# Altium PCB Quadcopter_final.PcbDoc
Units mm, origin at the board's own origin, x right, y up, seen from the top; angles counter-clockwise.
Board outline 100 x 100 mm, 2 copper layers (Top Layer, Bottom Layer); 90 components, 79 nets, 319 pads, 71 vias.
Unrouted connection lines stored in the file: 6.
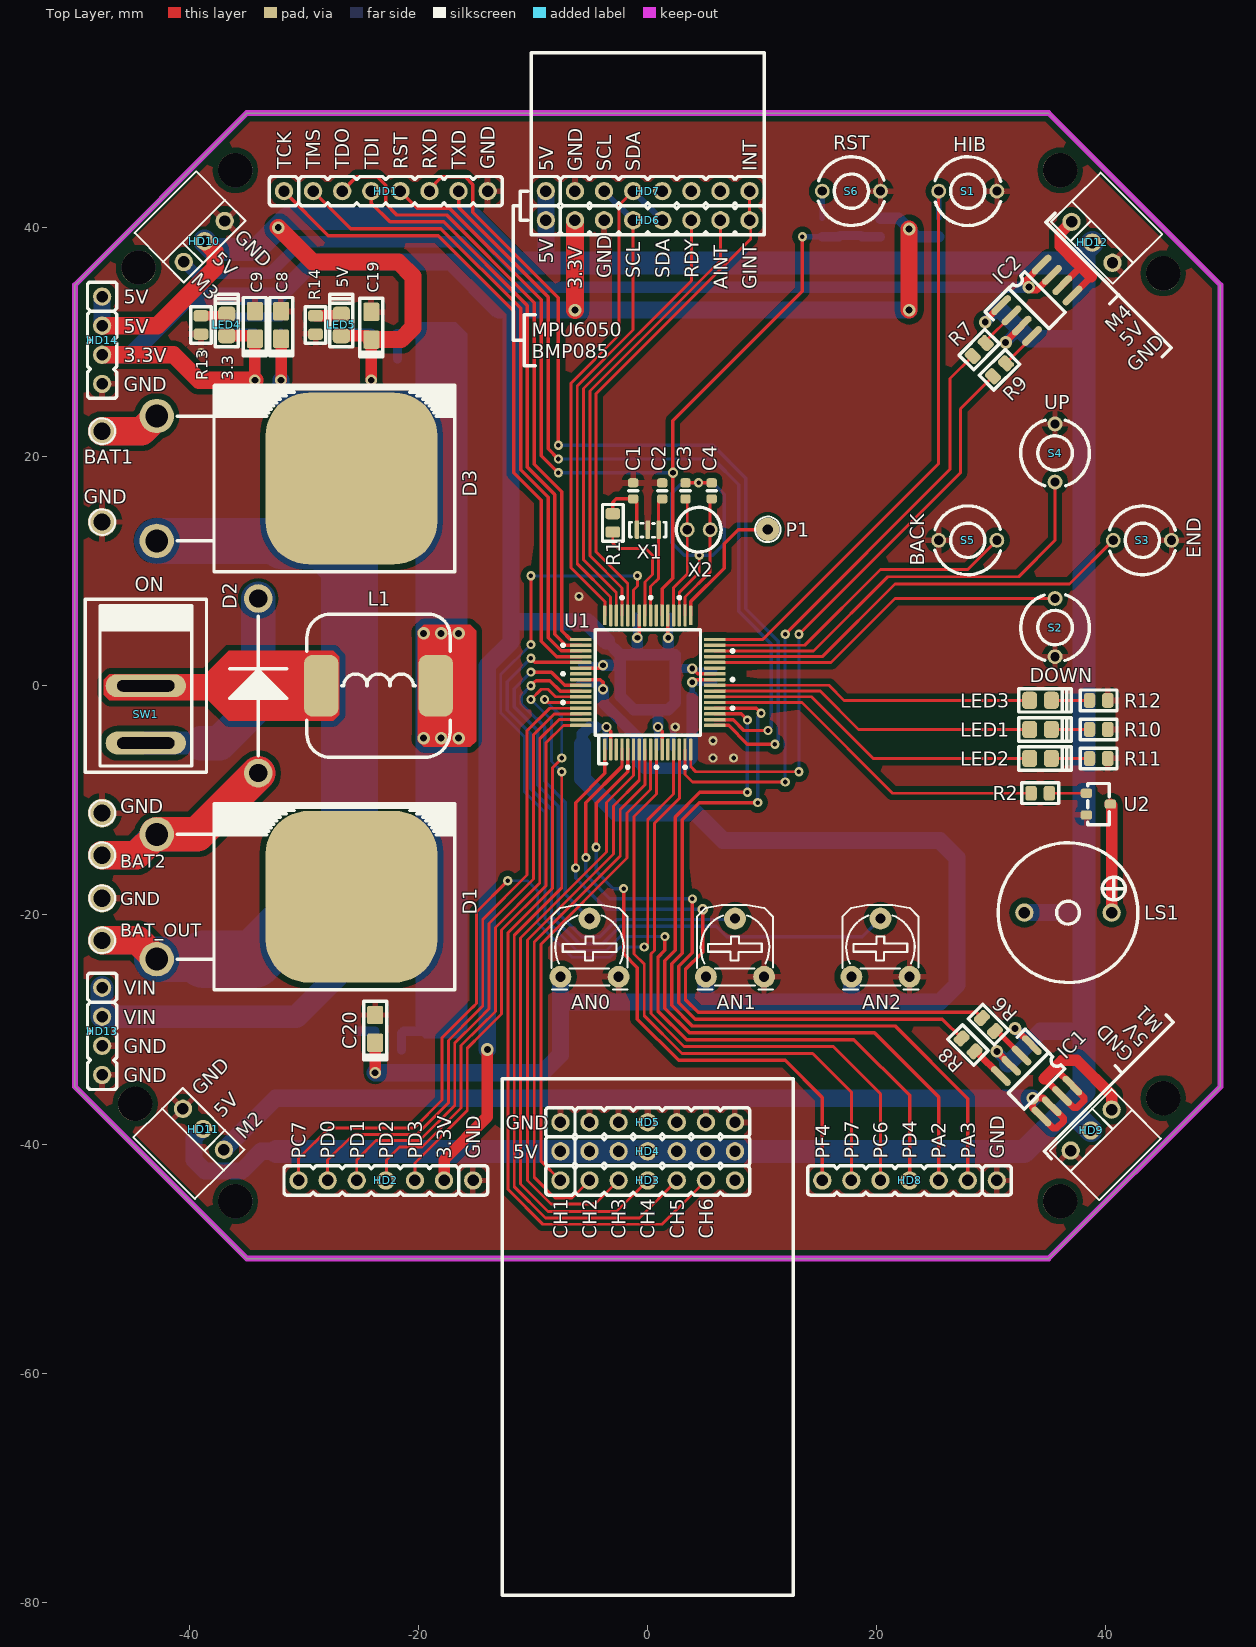
[diagram p0: Top Layer view]
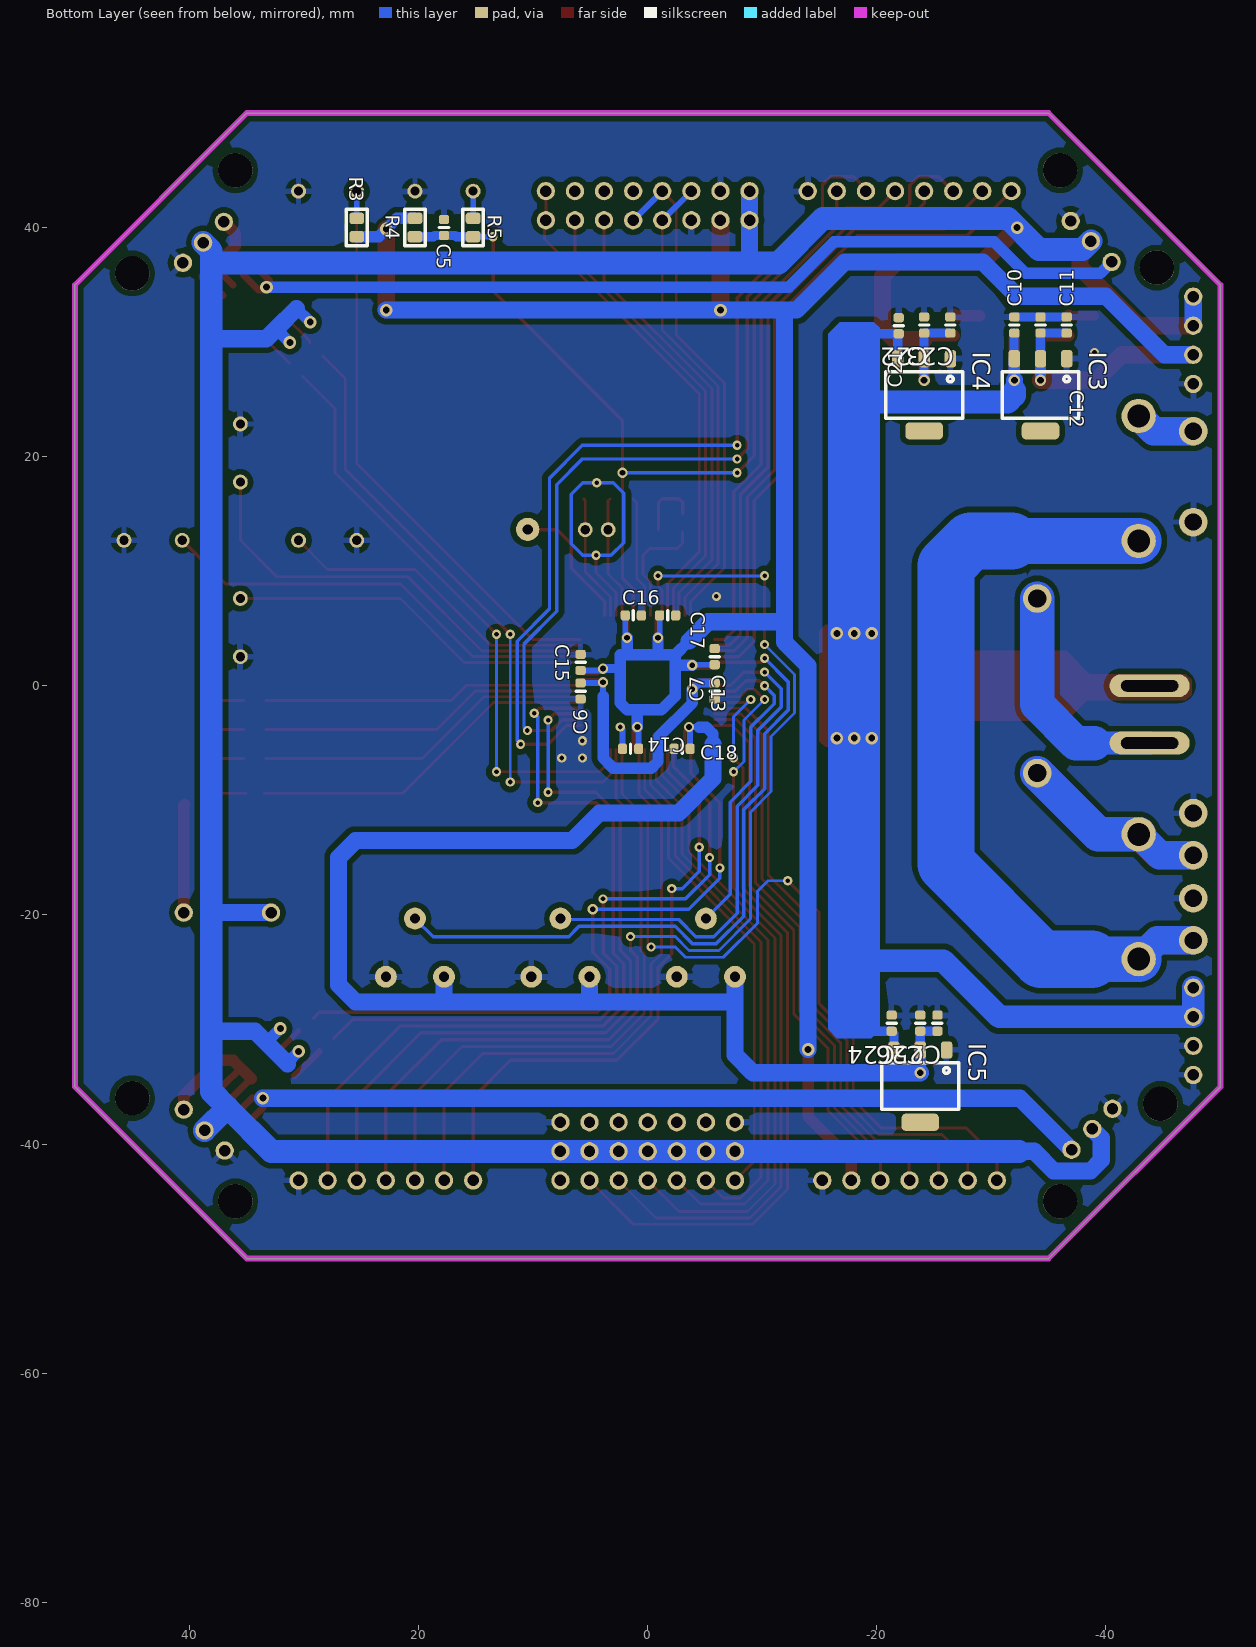
[diagram p1: Bottom Layer view, seen from below]
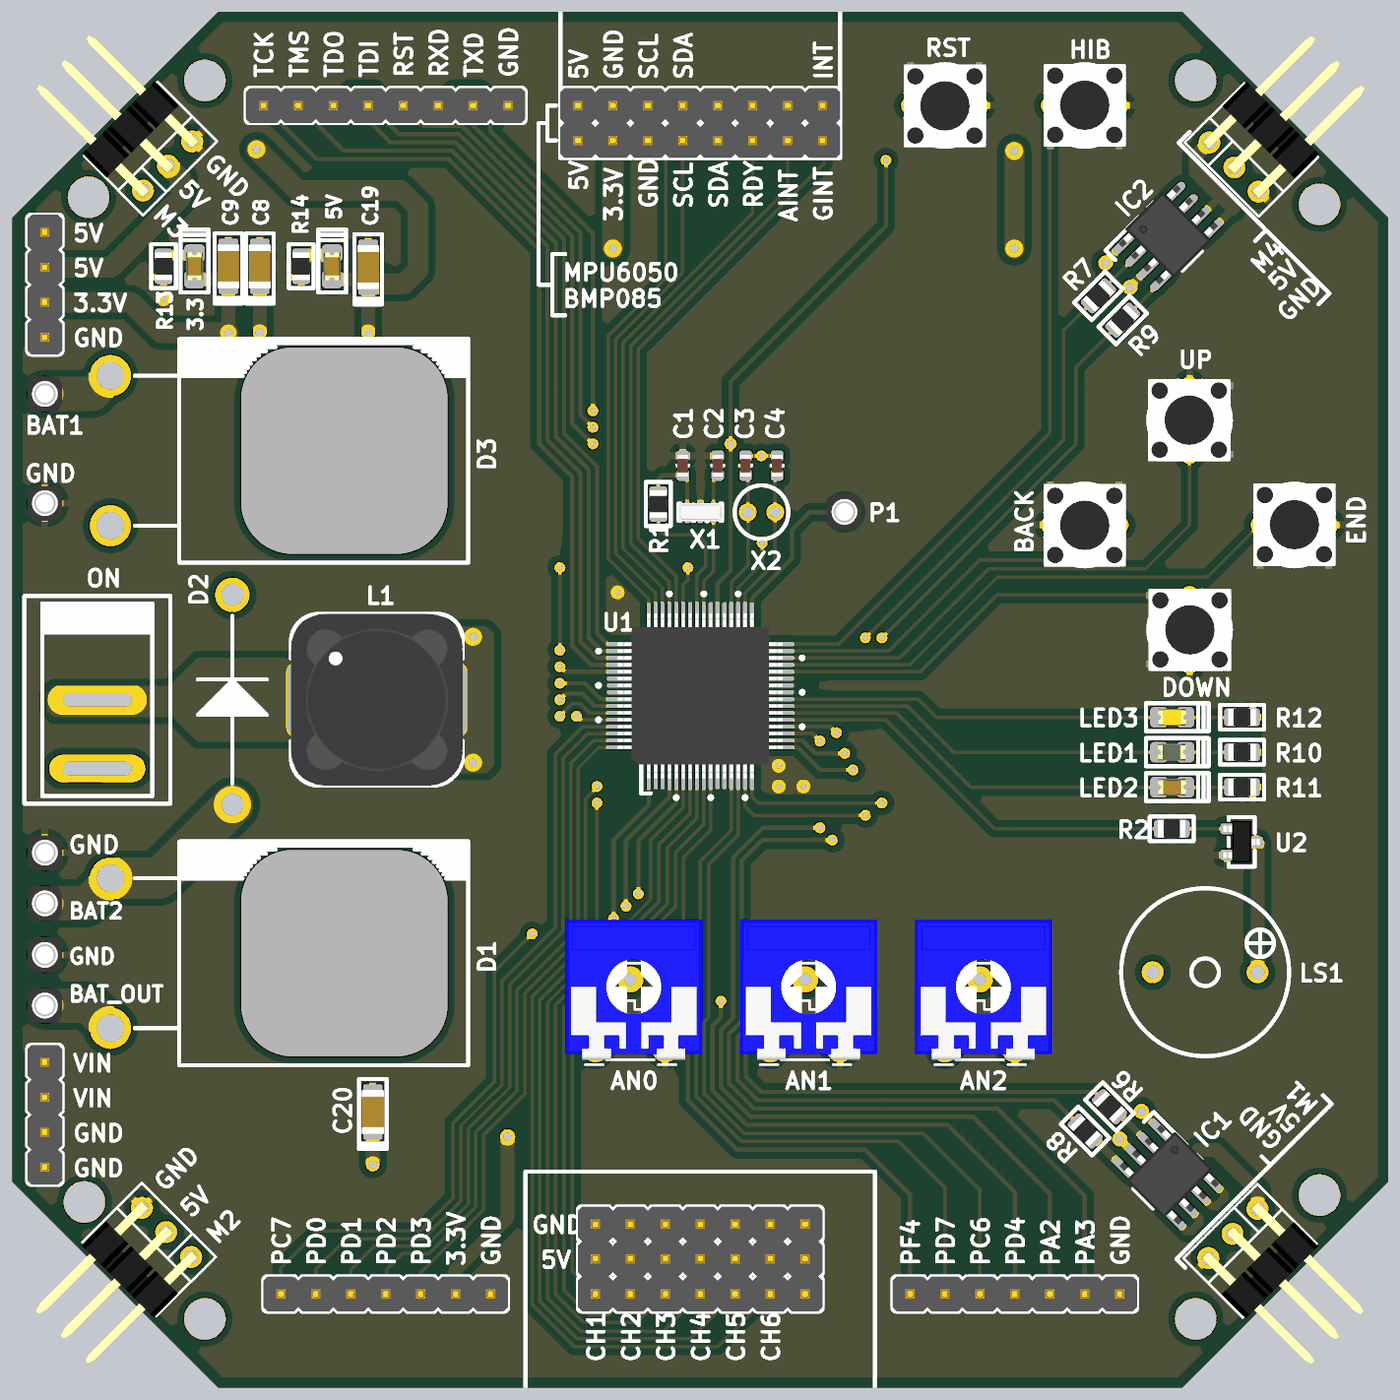
[diagram p2: 3D render of the assembled board from above, using the file's embedded part models]
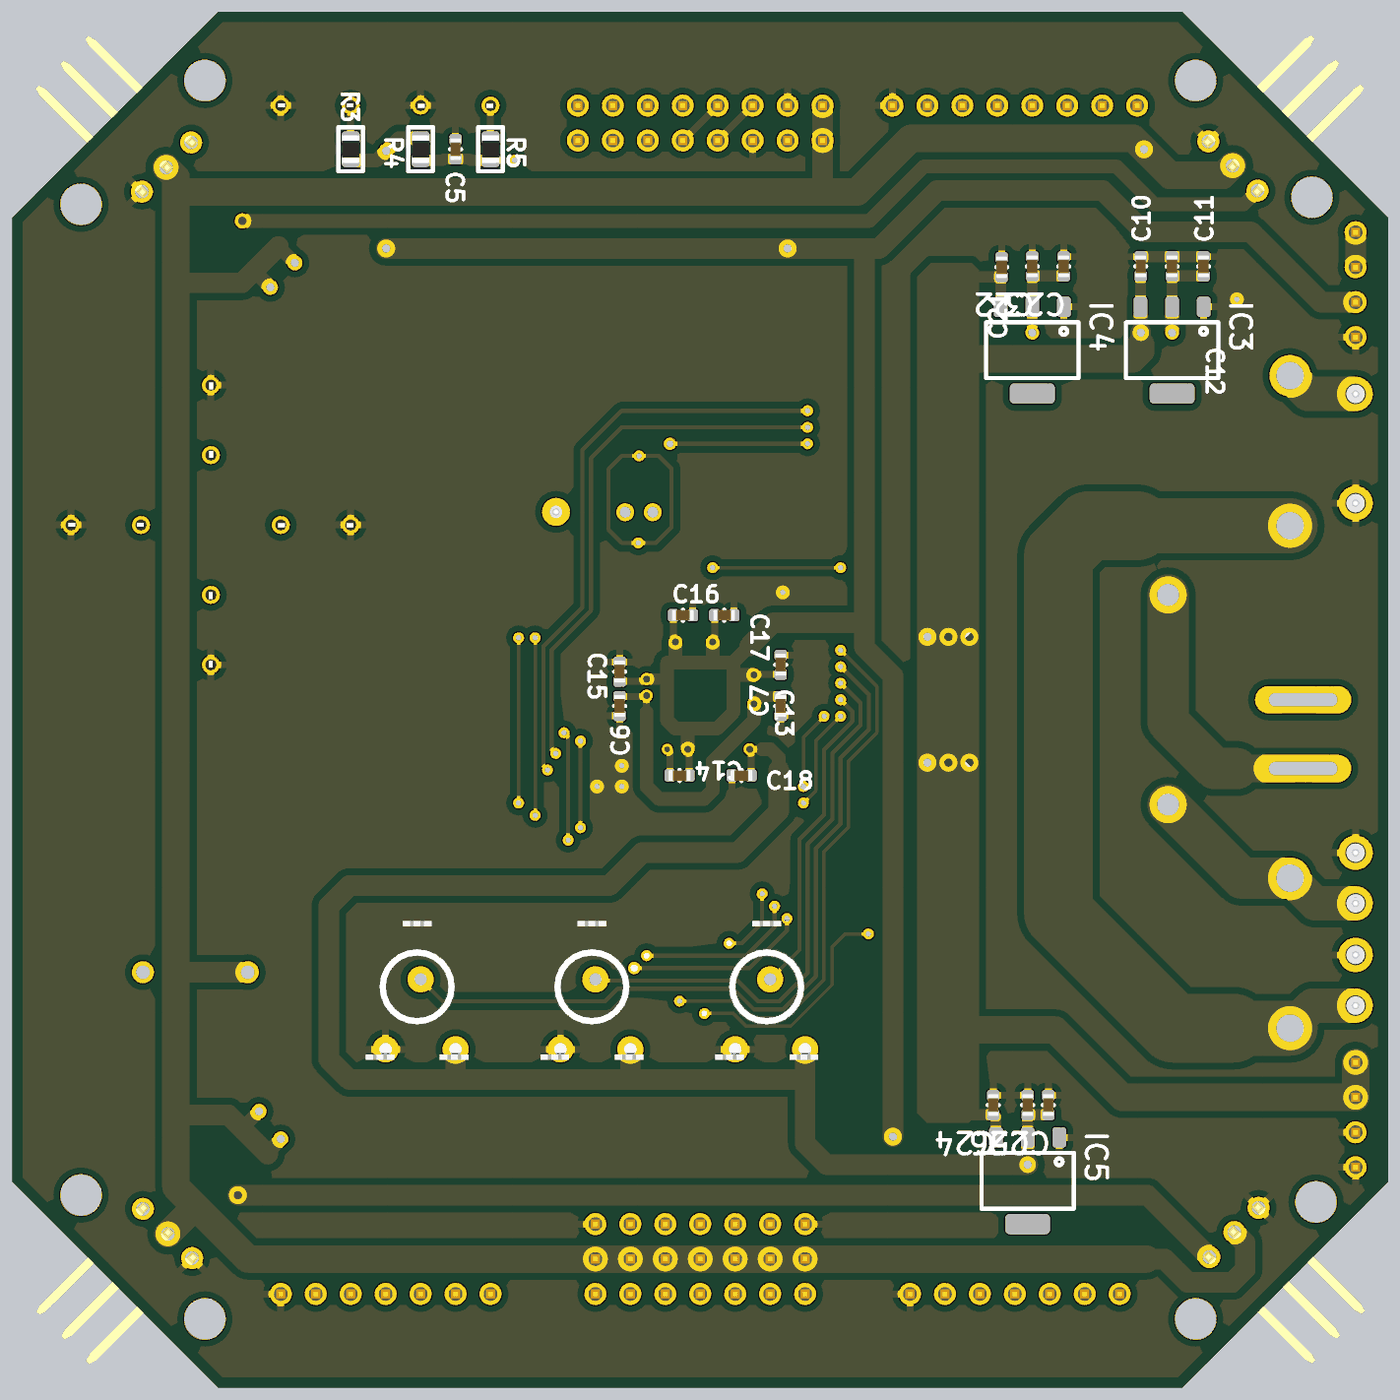
[diagram p3: 3D render of the assembled board from below, using the file's embedded part models]

## Layer stack, top to bottom
Top Layer: signal copper 0.0356
Dielectric: dielectric 0.32, FR-4, Dk 4.8
Bottom Layer: signal copper 0.0356

## Board outline
-50,-35 -35,-50 35,-50 50,-35 50,35 35,50 -35,50 -50,35

## Design rules (kind name [scope] priority, off if disabled: settings)
Clearance [All] p1: gap=0.5
PlaneClearance [All] p1: clearance=0.5
PolygonConnect PolygonConnect_1 [isvia] p1: connectstyle=Direct reliefconductorwidth=0.254 reliefentries=4 polygonreliefangle="90 Angle"
PolygonConnect [All] p2: connectstyle=Relief reliefconductorwidth=0.5 reliefentries=4 polygonreliefangle="90 Angle"
RoutingVias [All] p1: holewidth=0.4 width=0.8 viastyle="Through Hole" minholewidth=0.4 minwidth=0.8 maxholewidth=0.6 maxwidth=1.1
SilkscreenOverComponentPads [All] p1: minsilkscreentomaskgap=0.254
SolderMaskExpansion [All] p1: expansion=0.102
Width [All] p1: maxlimit=5 minlimit=0.25 preferedwidth=0.5
26 further rules are at their usual default settings.

## Components (designator, comment, footprint, x,y, rotation, side; value= is the part's Value field where it differs from the comment)
AN0 "10K" VR -7.62,-25.4 r0 top (schematic designator VR2)
AN1 "10K" VR 5.08,-25.4 r0 top (schematic designator VR1)
AN2 "10K" VR 17.78,-25.4 r0 top (schematic designator VR3)
BAT1 "Pad" TP1#1 -47.625,22.225 r0 top (schematic designator P7)
BAT2 "Pad" TP1#1 -47.625,-14.795 r0 top (schematic designator P4)
BAT_OUT "Pad" TP1#1 -47.625,-22.225 r0 top (schematic designator P2)
C1 "10pF" C0603 -1.27,17.018 r270 top
C2 "10pF" C0603 1.27,17.018 r270 top
C3 "22pF" C0603 3.302,17.018 r90 top
C4 "22pF" C0603 5.588,17.018 r270 top
C5 "SMD Cap" C0603 17.78,40.005 r90 bottom
C6 "SMD Cap" C0603 5.857,-0.458 r270 bottom
C7 "SMD Cap" C0603 -5.843,-0.458 r270 bottom
C8 "Cap Tan" CAP_TANTA_1uF_16V -32.004,31.496 r90 top
C9 "Cap Tan" CAP_TANTA_1uF_16V -34.29,31.496 r90 top
C10 "SMD Cap" C0603 -32.004,31.496 r270 bottom
C11 "SMD Cap" C0603 -36.576,31.496 r270 bottom
C12 "SMD Cap" C0603 -34.29,31.496 r270 bottom
C13 "SMD Cap" C0603 -5.843,2.542 r90 bottom
C14 "SMD Cap" C0603 1.5,-5.5 r0 bottom
C15 "SMD Cap" C0603 5.857,2.042 r90 bottom
C16 "SMD Cap" C0603 1.257,6.142 r180 bottom
C17 "SMD Cap" C0603 -1.743,6.142 r180 bottom
C18 "SMD Cap" C0603 -3,-5.5 r0 bottom
C19 "Cap Tan" CAP_TANTA_1uF_16V -24.13,31.432 r90 top
C20 "Cap Tan" CAP_TANTA_1uF_16V -23.793,-29.953 r90 top
C21 "SMD Cap" C0603 -21.907,31.432 r270 bottom
C22 "SMD Cap" C0603 -24.13,31.496 r270 bottom
C23 "SMD Cap" C0603 -26.416,31.496 r270 bottom
C24 "SMD Cap" C0603 -21.292,-29.452 r270 bottom
C25 "SMD Cap" C0603 -25.293,-29.452 r270 bottom
C26 "SMD Cap" C0603 -23.793,-29.452 r270 bottom
D1 "DSEI60-06A" DSEI60-06A_STAND -42.863,-18.415 r270 top
D2 "1N5822" 1N5822 -34,0 r90 top
D3 "DSEI60-06A" DSEI60-06A_STAND -42.863,18.097 r270 top
GND "Pad" TP1#1 -47.625,-18.542 r90 top (schematic designator P3)
GND "Pad" TP1#1 -47.625,-11.112 r90 top (schematic designator P5)
GND "Pad" TP1#1 -47.625,14.287 r90 top (schematic designator P6)
HD1 "SWD" Header_8 -22.86,43.18 r0 top
HD2 "Header 7" Header_7 -22.86,-43.18 r180 top
HD3 "Header 7" Header_7 0,-43.18 r0 top
HD4 "Header 7" Header_7 0,-40.64 r0 top
HD5 "Header 7" Header_7 0,-38.1 r0 top
HD6 "GY-85 BMP085" Header_8 0,40.64 r0 top
HD7 "MPU6050" Header_8 0,43.18 r0 top
HD8 "Header 7" Header_7 22.86,-43.18 r180 top
HD9 "Header 3" JP3H_NAM 40.5,-37 r225 top
HD10 "Header 3" JP3H_NAM -40.5,37 r45 top
HD11 "Header 3" JP3H_NAM -37,-40.5 r135 top
HD12 "Header 3" JP3H_NAM 37,40.5 r315 top
HD13 "Power" Header_4 -47.625,-30.162 r270 top
HD14 "Power" Header_4 -47.625,30.162 r270 top
IC1 "APM4953" SOIC-8D 33.947,-34.489 r315 top
IC2 "APM4953" SOIC-8D 33.972,33.655 r45 top
IC3 "AMS1117-3.3V" AMS1117-3.3V -34.29,25.4 r270 bottom
IC4 "AMS1117-5V" AMS1117-3.3V -24.13,25.4 r270 bottom
IC5 "AMS1117-3.3V" AMS1117-3.3V -23.793,-34.952 r270 bottom
L1 "150mH/3A" "Inductor 150mH,3A" -23.5,0 r0 top
LED1 "Green" "Led 0805G" 34.29,-3.81 r0 top
LED2 "Red" "Led 0805R" 34.29,-6.35 r0 top
LED3 "Yellow" "Led 0805Y" 34.29,-1.27 r0 top
LED4 "Red" "Led 0805R" -36.75,31.5 r90 top
LED5 "Red" "Led 0805R" -26.75,31.5 r90 top
LS1 "Speaker" SPEAKER 40.5,-19.8 r180 top
P1 "Pad" TP1#2 10.477,13.652 r90 top
R1 "Res2" RESC2012L -3.048,14.224 r90 top
R2 "Res2" RESC2012L 34.265,-9.377 r0 top
R3 "Res2" RESC2012L 25.4,40.005 r90 bottom
R4 "Res2" RESC2012L 20.32,40.005 r90 bottom
R5 "Res2" RESC2012L 15.24,40.005 r270 bottom
R6 "Res2" RESC2012L 29.741,-29.575 r315 top
R7 "Res2" RESC2012L 28.94,29.354 r45 top
R8 "Res2" RESC2012L 27.973,-31.343 r315 top
R9 "Res2" RESC2012L 30.708,27.586 r45 top
R10 "330R" RESC2012L 39.37,-3.81 r0 top
R11 "330R" RESC2012L 39.37,-6.35 r0 top
R12 "330R" RESC2012L 39.37,-1.27 r0 top
R13 "560R" RESC2012L -39,31.5 r270 top
R14 "1K" RESC2012L -29,31.5 r270 top
S1 "WAKE" "BUTTON 2PIN TRON" 27.94,43.18 r180 top
S2 "DOWN" "BUTTON 2PIN TRON" 35.56,5.08 r90 top
S3 "UP" "BUTTON 2PIN TRON" 43.18,12.7 r180 top
S4 "ENT" "BUTTON 2PIN TRON" 35.56,20.32 r270 top
S5 "BACK" "BUTTON 2PIN TRON" 27.94,12.7 r0 top
S6 "RESET" "BUTTON 2PIN TRON" 17.78,43.18 r0 top
SW1 "ON/OFF" CKCD11-101 -43.815,0 r90 top
U1 "TM4C123GH6PM" TM4C123GH6PM 0.007,0.292 r0 top
U2 "2N2222" MMBT2222A 39.345,-10.33 r270 top
X1 "16Mhz" CSTCE16M0V53-R0 0.007,13.627 r180 top
X2 "32768Hz" "32.678 Khz" 4.452,13.627 r0 top

## Footprints (in the part's own frame and the unit in brackets; to place one, negate y for a bottom-side part, rotate by r counter-clockwise, add the part's x,y. Pads: shape width x height; smd on the part's side, far side on the other; paste and mask are expansions set on the pad)
1N5822 [mm] "DIODE_DIP"
  round 2.5 hole 1.6 mask+0.1: 1(-7.62,0) 2(7.62,0)
  silkscreen extent -6.09,-2.62 6.09,2.63
"32.678 Khz" [mm] "32.678 Khz"
  round 1.3 hole 0.8 mask+0.1: 1(-1,0) 2(1,0)
  silkscreen extent -1.95,-1.95 1.95,1.95
AMS1117-3.3V [mm] "SOT223, 4-Leads, Body 6.7x7.3mm (max), Pitch 2.30mm, IPC Medium Density"
  rrect50% 1.5x1 smd: 1(-3.15,2.3) 2(-3.15,0) 3(-3.15,-2.3)
  rrect50% 1.5x3.28 smd: 4(3.15,0)
  silkscreen extent -2.03,-3.35 2.03,3.36
"BUTTON 2PIN TRON" [mm] "PIN TO PIN 5.08, W=6MM"
  round 1.3 hole 0.8: 1(-2.54,0) 2(2.54,0)
  silkscreen extent -2.87,-3 2.86,3, body extent -3,-3.02 3,3.18, height 4.3
C0603 [mm] "Chip Capacitor, Body 1.6x0.8mm, 1608"
  rrect50% 0.8x0.9 smd: 1(-0.7,0) 2(0.7,0)
  silkscreen extent 0,-0.4 0,0.4, body extent -0.8,-0.4 0.8,0.4, height 0.6
CAP_TANTA_1uF_16V [mm] "CAP TANTALUM 1uF 16V 10% C1206(3216), Body 3.2x1.6mm"
  rrect20% 1.6x1.4 smd: 1(-1.21,0) 2(1.21,0)
  silkscreen extent -2.7,-1 2.4,1, body extent -1.6,-0.8 1.6,0.8, height 1
CKCD11-101 [mm] "Cong tac on off 15.1x10.6mm"
  oval 2x7 hole 1 slot 5 at 90 deg mask+0.1: 1(-5,0) 2(0,0)
  silkscreen extent -7.55,-5.3 7.55,5.3
CSTCE16M0V53-R0 [mm] "Cryxtal 16MHz_SMD"
  rrect50% 0.4x1.6 smd: 1(0.95,0) 2(-0.95,0) 3(0,0)
  silkscreen extent -1.6,-0.65 1.6,0.66, body extent -1.6,-0.65 1.6,0.65, height 1.02
DSEI60-06A_STAND [mm] "Dioed 6A_Stand"
  round 3 hole 2: 1(-5.45,0) 2(5.45,0)
  rrect50% 15x15 smd mask+0.1: 3(0,17)
  silkscreen extent -8.13,1.78 8.14,26
Header_4 [mm] "Connector DIP, 4Pin_2.54mm"
  round 1.6 hole 1 mask+0.1: 1(-3.81,0) 2(-1.27,0) 3(1.27,0) 4(3.81,0)
  silkscreen extent -5.08,-1.28 5.08,1.28, body extent -5.08,-1.27 5.08,1.27, height 10.1
Header_7 [mm] "Connector DIP Male, 7Pin_2.54mm"
  round 1.6 hole 1 mask+0.1: 1(-7.62,0) 2(-5.08,0) 3(-2.54,0) 4(0,0) 5(2.54,0) 6(5.08,0) 7(7.62,0)
  silkscreen extent -8.89,-1.28 8.89,1.28, body extent -8.89,-1.27 8.89,1.27, height 10.1
Header_8 [mm] "Connector DIP Male, 8Pin_2.54mm"
  round 1.6 hole 1 mask+0.1: 1(-8.89,0) 2(-6.35,0) 3(-3.81,0) 4(-1.27,0) 5(1.27,0) 6(3.81,0) 7(6.35,0) 8(8.89,0)
  silkscreen extent -10.16,-1.28 10.16,1.28, body extent -10.16,-1.27 10.16,1.27, height 10.1
"Inductor 150mH,3A" [mm] "Inductor 150mH,3A"
  rrect50% 3x5.4 smd mask+0.1: 1(-5,0) 2(5,0)
  silkscreen extent -6.25,-6.25 6.25,6.25, body extent -6.25,-6.25 6.25,6.25, height 6.7
JP3H_NAM [mm]
  round 1.6 hole 1: 1(0,0) 2(2.565,0) 3(5.055,0)
  silkscreen extent -1.27,-1.27 6.35,4.83, body extent -1.2,-0.38 6.22,10.76, height 2.52
"Led 0805G" [mm] "Chip LED; Green; Body 2.0 x 1.3 mm (LxW typ)"
  rrect50% 1.3x1.5 smd: 1(-0.95,0) 2(0.95,0)
  silkscreen extent -1.91,-1.02 2.67,1.02, body extent -1.04,-0.62 0.98,0.62, height 1.1
"Led 0805R" [mm] "Chip LED; RED ; Body 2.0 x 1.3 mm (LxW typ)"
  rrect50% 1.3x1.5 smd: 1(-0.95,0) 2(0.95,0)
  silkscreen extent -1.91,-1.02 2.67,1.02, body extent -1.01,-0.63 1.01,0.62, height 1.1
"Led 0805Y" [mm] "Chip LED; Yellow; Body 2.0 x 1.3 mm (LxW typ)"
  rrect50% 1.3x1.5 smd: 1(-0.95,0) 2(0.95,0)
  silkscreen extent -1.91,-1.02 2.67,1.02, body extent -1.01,-0.63 1.01,0.62, height 1.1
MMBT2222A [mm] "SOT23-3"
  rrect50% 0.8x1 smd: 1(-0.95,-1.05) 2(0.95,-1.05) 3(0,1.05)
  silkscreen extent -1.8,-0.95 1.8,0.95, body extent -1.5,-1.32 1.5,1.32, height 1.08
RESC2012L [mm] "Chip Resistor, Body 2.0x1.3mm, 1/8W 0805"
  rrect50% 1x1.3 smd: 1(-0.8,0) 2(0.8,0)
  silkscreen extent -1.6,-0.9 1.6,0.9, body extent -1,-0.62 1,0.63, height 0.6
SOIC-8D [mm] "SOIC 8PIN, 1.27mm"
  oval 2.2x0.6 smd: 1(-2.5,1.905) 2(-2.5,0.635) 3(-2.5,-0.635) 4(-2.5,-1.905) 5(2.5,-1.905) 6(2.5,-0.635) 7(2.5,0.635) 8(2.5,1.905)
  silkscreen extent -3.9,-2.5 1,2.5, body extent -2.89,-2.43 3.15,2.59, height 1.6
SPEAKER [mm] "TMB12A05"
  round 1.6 hole 1 mask+0.1: 1(0,0) 2(7.62,0)
  silkscreen extent -2.29,-6.1 9.91,6.1
TM4C123GH6PM [mm]
  rrect50% 0.3x1.9 smd mask+0.05: 1(-3.75,-5.85) 2(-3.25,-5.85) 3(-2.75,-5.85) 4(-2.25,-5.85) 5(-1.75,-5.85) 6(-1.25,-5.85) 7(-0.75,-5.85) 8(-0.25,-5.85) 9(0.25,-5.85) 10(0.75,-5.85) 11(1.25,-5.85) 12(1.75,-5.85) 13(2.25,-5.85) 14(2.75,-5.85) 15(3.25,-5.85) 16(3.75,-5.85) 34(3.25,5.85) 35(2.75,5.85) 36(2.25,5.85) 37(1.75,5.85) 38(1.25,5.85) 39(0.75,5.85) 40(0.25,5.85) 41(-0.25,5.85) 42(-0.75,5.85) 43(-1.25,5.85) 44(-1.75,5.85) 45(-2.25,5.85) 46(-2.75,5.85) 47(-3.25,5.85)
  rrect50% 1.9x0.3 smd mask+0.05: 17(5.85,-3.75) 18(5.85,-3.25) 19(5.85,-2.75) 20(5.85,-2.25) 21(5.85,-1.75) 22(5.85,-1.25) 23(5.85,-0.75) 24(5.85,-0.25) 25(5.85,0.25) 26(5.85,0.75) 27(5.85,1.25) 28(5.85,1.75) 29(5.85,2.25) 30(5.85,2.75) 31(5.85,3.25) 32(5.85,3.75) 49(-5.85,3.75) 50(-5.85,3.25) 51(-5.85,2.75) 52(-5.85,2.25) 53(-5.85,1.75) 54(-5.85,1.25) 55(-5.85,0.75) 56(-5.85,0.25) 57(-5.85,-0.25) 58(-5.85,-0.75) 59(-5.85,-1.25) 60(-5.85,-1.75) 61(-5.85,-2.25) 62(-5.85,-2.75) 63(-5.85,-3.25) 64(-5.85,-3.75)
  rrect50% 0.3x1.7 smd mask+0.05: 33(3.75,5.85) 48(-3.75,5.85)
  silkscreen extent -7.5,-7.5 7.5,7.5, body extent -6,-6 6,6, height 1.56
TP1#1 [mm] "Test point"
  round 2.5 hole 1.5: 1(0,0)
  silkscreen extent -1.11,-1.12 1.12,1.12, body extent -1.27,-1.27 1.27,1.27, height 4.52
TP1#2 [mm] "Test point"
  round 2.032 hole 0.889: 1(0,0)
  silkscreen extent -1.12,-1.12 1.12,1.11, body extent -1.27,-1.27 1.27,1.27, height 4.52
VR [mil] "Resistor Variable"
  round 75 hole 35: 1(0,0) 2(100,200) 3(200,0)
  silkscreen extent -31,-44 231,246, body extent -87,-30 307,372, height 165

## Part data
AN0 AN1 AN2: library part VR1, "Var Resistor"
C1 C2 C3 C4 C6 C7 C13 C14 C15 C16 C17 C18: library part CN1, "0805-SMD Capacitor"
C5: library part Cap, "0805-10nF-50V Cap"
C8 C9 C19 C20: library part "Cap Pol2", "Cap Tantalum"
C10 C11 C12 C21 C22 C23 C24 C25 C26: library part "Cap Cera", "SMD Capacitor"
D1 D3: library part D1A, "Diode 60A"
D2: library part D1A, "Diode  3A"
HD1 HD6 HD7: library part Hed8, "Hedear 8"
HD2 HD3 HD4 HD5 HD8: library part Hed7
HD9 HD10 HD11 HD12: library part Hed3, "Header 3 (Green)"
HD13 HD14: library part Hed4, "Header 4 (Green)"
IC1 IC2: "Dual P-Channel Enhancement Mode MOSFET"
IC3 IC4 IC5: library part AMS1117
L1: library part L1, "Inductor"
LED1 LED2 LED3 LED4 LED5: library part LED, "LED Single colour Green and Red"
LS1: "Loudspeaker"
R1 R2 R3 R4 R5 R6 R7 R8 R9: "Resistor"
R10 R11 R12 R13 R14: library part R, "Resistor 1/4W"
S1 S2 S3 S4 S5 S6: library part SW-PB, "Switch"
SW1: library part SW2, "Switch button 2 pin"
U1: "Tiva C Series Microcontroller"
U2: "NPN switching transistors"
X1 X2: library part XT2, "Crystal For all Crystal 2pin."

## Free pads (board coordinates)
  round 3 hole 3: 0(36,-45) 1(45,-36) 2(36,45) 3(45,36) 4(-44.45,36.512) 5(-36,45) 6(-44.75,-36.5) 7(-36,-45)

## Via types
v1: diameter 0.8, hole 0.4, Top Layer to Bottom Layer, 40 vias
v2: diameter 1.1, hole 0.6, Top Layer to Bottom Layer, 17 vias
v3: diameter 0.9, hole 0.5, Top Layer to Bottom Layer, 10 vias
v4: diameter 1, hole 0.6, Top Layer to Bottom Layer, 4 vias

## Nets (pads, with @x,y where several pads share a name; then routed paths per layer and width w, separated by ;. In a path a pad name is that pad's centre, name@x,y a point inside that pad or via, vN(x,y) a via of type N, cw(c..) or ccw(c..) an arc to the next point about the centre after c; other vN are vias at no path point)
3V3: C9.1 C11.2 C12.2 C13.1 C14.1 C15.1 C16.1 C17.1 HD2.2 HD6.2 HD14.3 IC3.2 LED4.1 R3.1 R4.2 U1.11 U1.26 U1.37 U1.42 U1.54 | length 258
  Top Layer w0.3: U1.54 -4.157,1.542 v3(-3.9,1.8) ; v3(-0.9,4.2) -0.743,4.357 U1.42 ; v3(0.9,-3.6) 1.257,-3.957 U1.11 ; U1.37 1.757,4.243 v3(1.8,4.2) ; v3(3.9,1.5) 4.357,1.042 U1.26
  Top Layer w1: LED4.1 -34.554,30.55 C9.1 v4(-34.29,26.67) ; HD2.2 -17.78,-41.402 -14,-37.622 v2(-14,-31.75)
  Top Layer w1.5: HD14.3 -41.393,28.893 -39.17,26.67 v4(-34.29,26.67) ; v2(22.822,32.794) v2(22.822,39.878)
  Top Layer w1.55: v2(-6.35,32.794) HD6.2
  Bottom Layer w0.5: C13.1 -3.943,1.843 v3(-3.9,1.8) ; C17.1 -1.043,4.343 v3(-0.9,4.2) ; C14.1 0.8,-3.7 v3(0.9,-3.6) ; v3(1.8,4.2) 1.957,4.357 C16.1 ; v3(3.9,1.5) 4.058,1.342 C15.1
  Bottom Layer w0.8: C11.2 C12.2 IC3.2 ; 2.4,1.5 v3(3.9,1.5)
  Bottom Layer w1: v4(-34.29,26.67) IC3.2 ; v3(-3.9,1.8) -2.4,1.8 ; -3.6,3.9 -2.4,2.7 ; v3(-0.9,4.2) -0.9,2.7 ; v3(0.9,-3.6) 0.9,-2.1 ; v3(1.8,4.2) 1.8,2.7 ; R4.2 21.895,40.805 v2(22.822,39.878) 23.495,39.205 R3.1 ; -2.4,1.8 -2.4,2.7 ; -2.4,1.8 -2.4,-0.9 -1.2,-2.1 0.9,-2.1 ; -2.4,2.7 -0.9,2.7 ; -0.9,2.7 1.8,2.7 ; 0.9,-2.1 1.8,-2.1 2.4,-1.5 2.4,1.5 2.4,2.7 1.8,2.7
  Bottom Layer w1.5: HD14.3 -45.107,28.893 -40,34 -32.25,34 -29.25,37 -17.2,37 -12.994,32.794 -11.938,32.794 ; v2(-14,-31.75) -14,1.748 -11.938,3.81 -11.938,5.588 ; -3.6,3.9 -5.288,5.588 -11.938,5.588 ; v2(22.822,32.794) v2(-6.35,32.794) -11.938,32.794 ; -11.938,5.588 -11.938,32.794
3V3A: AN0.1 AN1.1 AN2.1 C18.1 C20.1 C25.2 C26.2 IC5.2 U1.2 | length 128
  Top Layer w0.3: v3(-3.6,-3.6) -3.243,-3.957 U1.2
  Top Layer w1: v4(-23.793,-33.782) C20.1
  Bottom Layer w0.5: -4.5,-3.6 v3(-3.6,-3.6) -3.7,-3.7 C18.1
  Bottom Layer w0.8: C25.2 C26.2 IC5.2
  Bottom Layer w1: v4(-23.793,-33.782) IC5.2 ; -5.7,-5.1 -5.7,-4.2 -5.1,-3.6 -4.5,-3.6
  Bottom Layer w1.5: v4(-23.793,-33.782) -9.182,-33.782 -7.62,-32.22 -7.62,-27.6 ; AN0.1 -7.62,-27.6 ; -5.7,-5.1 -5.7,-8.1 -2.7,-11.1 4.2,-11.1 6.6,-13.5 25.5,-13.5 27,-15 27,-26.1 25.5,-27.6 17.78,-27.6 ; 5.08,-27.58 AN1.1 ; AN2.1 17.78,-27.6 ; -7.62,-27.6 17.78,-27.6
5V: C19.1 C22.2 C23.2 HD4.1 HD4.2 HD4.3 HD4.4 HD4.5 HD4.6 HD4.7 HD6.1 HD7.1 HD9.2 HD10.2 HD11.2 HD12.2 HD14.1 HD14.2 IC1.1 IC1.3 IC2.1 IC2.3 IC4.2 LED5.1 LS1.2 | length 335.8
  Top Layer w0.6: v2(29.464,31.75) 29.464,31.841 IC2.1 ; v2(30.48,-31.919) IC1.3 ; v2(31.242,29.972) 31.242,30.026 IC2.3 ; v2(32.067,-29.915) IC1.1
  Top Layer w1: LED5.1 -24.457,30.55 C19.1 v4(-24.13,26.67)
  Top Layer w1.5: HD14.2 -42.818,31.432 -37.75,36.5 -37.75,37.878 HD10.2 ; v2(-32.25,40) -29.25,37 -21.75,37 -20.5,35.75 -20.5,31.25 -21.528,30.222 C19.1
  Bottom Layer w0.8: C23.2 C22.2 IC4.2 v4(-24.13,26.67)
  Bottom Layer w1: v2(29.464,31.75) 30.657,32.943 ; v2(30.48,-31.919) 31.432,-32.872 ; v2(31.242,29.972) 32.435,31.165 ; v2(32.067,-29.915) 33.268,-31.115
  Bottom Layer w1.5: HD14.2 HD14.1 ; HD11.2 -39.6,-39.472 -39.6,-41.4 -38.65,-42.35 -35.45,-42.35 -33.74,-40.64 -32.4,-40.64 ; -9,36.9 -8.89,37.01 HD6.1 HD7.1 ; 30.657,32.943 32.435,31.165 33.3,30.3 38.1,30.3 ; 31.432,-33.02 34.29,-30.162 38.1,-30.162 ; LS1.2 38.1,-19.8
  Bottom Layer w2: HD10.2 -37.972,38.1 -34.15,38.1 -31.45,40.8 -15.3,40.8 -11.4,36.9 -9,36.9 ; -32.4,-40.64 HD4.1 HD4.2 HD4.3 HD4.4 HD4.5 HD4.6 HD4.7 32.86,-40.64 36.686,-36.814 ; -9.428,36.9 -9,36.9 ; HD9.2 36.686,-36.814 ; HD12.2 38.1,37.972 38.1,36.9 ; -9,36.9 38.1,36.9 ; 36.686,-36.814 38.1,-35.4 38.1,-30.162 38.1,-19.8 38.1,30.3 38.1,36.9
ADC_CH0: AN0.2 U1.58 | length 28.1
  Top Layer w0.3: v1(-10.2,0) -9.85,0.35 -9.848,0.35 -9.748,0.45 -8.55,0.45 -7.642,-0.458 U1.58
  Bottom Layer w0.3: v1(-10.2,0) -10.202,0 -11.05,-0.848 -11.05,-1.552 -10.552,-2.05 -10.55,-2.05 -9,-3.6 -9,-8.35 -7.2,-10.15 -7.2,-18.2 AN0.2
ADC_CH1: AN1.2 U1.57 | length 45
  Top Layer w0.3: v1(-10.2,1.2) -8.4,1.2 -7.243,0.042 U1.57
  Bottom Layer w0.3: v1(-10.2,1.2) -10.202,1.2 -11.65,-0.248 -11.65,-1.85 -9.6,-3.9 -9.6,-8.7 -7.8,-10.5 -7.8,-19.851 -5.751,-21.9 -4.2,-21.9 -2.7,-20.4 7.54,-20.4 AN1.2
ADC_CH2: AN2.2 U1.53 | length 60.8
  Top Layer w0.3: v1(-10.2,2.4) -9.85,2.05 -9.848,2.05 -9.84,2.042 U1.53
  Bottom Layer w0.3: v1(-10.2,2.4) -10.202,2.4 -12.25,0.352 -12.25,-2.15 -10.2,-4.2 -10.2,-9 -8.4,-10.8 -8.4,-20.1 -6,-22.5 -3.9,-22.5 -2.4,-21 6,-21 6.9,-21.9 18.74,-21.9 AN2.2
GND: AN0.3 AN1.3 AN2.3 C1.1 C2.1 C5.2 C6.2 C7.2 C8.2 C9.2 C10.1 C11.1 C12.1 C13.2 C14.2 C15.2 C16.2 C17.2 C18.2 C19.2 C20.2 C21.1 C22.1 C23.1 C24.1 C25.1 C26.1 GND.1 HD1.8 HD2.1 HD5.1 HD5.2 HD5.3 HD5.4 HD5.5 HD5.6 HD5.7 HD6.3 HD7.2 HD8.1 HD9.3 HD10.3 HD11.3 HD12.3 HD13.3 HD13.4 HD14.4 IC3.1 IC4.1 IC5.1 R10.2 R11.2 R12.2 R13.2 R14.2 S1.1 S2.1 S3.1 S4.1 S5.1 S6.2 U1.3 U1.12 U1.27 U1.39 U1.55 U2.2 X1.3 | length 6.6
  Bottom Layer w0.5: C14.2 2.2,-3.8 v1(2.4,-3.6)
  Bottom Layer w0.8: C11.1 C10.1
  other v1: 5.7,-6.3 7.5,-6.3 5.7,-4.8 -6,7.8 -39,29.1
GNDX: C3.2 C4.1 U1.35 | length 27.7
  Top Layer w0.25: U1.35 2.757,8.157 4.5,9.9 v1(4.5,11.4)
  Top Layer w0.3: C3.2 v1(4.445,17.718) C4.1
  Bottom Layer w0.3: 2.1,12.505 2.1,16.8 3.018,17.718 5.682,17.718 6.667,16.732 6.667,12.383 5.685,11.4 v1(4.5,11.4) 3.205,11.4 2.1,12.505
GY-AINT: HD6.7 U1.45 | length 40.4
  Top Layer w0.25: U1.45 -2.243,8.543 -5.05,11.35 -5.05,25.728 6.35,37.128 HD6.7
GY-GINT: HD6.8 HD7.8 U1.44 | length 43.8
  Top Layer w0.25: U1.44 -1.743,8.943 -4.5,11.7 -4.5,25.5 9,39 9,40.53 HD6.8 HD7.8
GY-RDY: HD6.6 U1.46 | length 39.6
  Top Layer w0.25: U1.46 -2.743,8.143 -5.6,11 -5.6,25.956 3.81,35.366 HD6.6
GY-SCL: HD6.4 HD7.3 U1.47 | length 41.3
  Top Layer w0.25: U1.47 -3.243,7.743 -6.15,10.65 -6.15,26.183 -1.27,31.063 HD6.4
  Bottom Layer w0.5: HD7.3 HD6.4
GY-SDA: HD6.5 HD7.4 U1.48 | length 44.1
  Top Layer w0.25: U1.48 -3.743,7.342 -6.7,10.3 -6.7,26.411 -2.495,30.616 -2.495,41.955 HD7.4
  Bottom Layer w0.5: HD7.4 HD6.5
LED_G: LED1.1 U1.23 | length 28.9
  Top Layer w0.25: U1.23 15.063,-0.458 18.415,-3.81 LED1.1
LED_R: LED2.1 U1.22 | length 29.7
  Top Layer w0.25: U1.22 14.293,-0.958 19.685,-6.35 LED2.1
LED_Y: LED3.1 U1.24 | length 28
  Top Layer w0.25: U1.24 15.833,0.042 17.145,-1.27 LED3.1
MOTOR1: HD9.1 IC1.7 IC1.8 | length 17.7
  Top Layer w0.6: 34.627,-34.27 IC1.7 37.177,-36.82 37.488,-36.82 38.088,-36.22 38.088,-35.936 IC1.8 35.56,-33.407
  Top Layer w1: 34.607,-34.29 36.195,-32.703 37.465,-32.703 40.5,-35.738 HD9.1
MOTOR2: HD11.1 IC1.5 IC1.6 | length 80.7
  Top Layer w0.6: IC1.5@33.6,-36.835 v2(33.6,-36) 34.561,-36 IC1.6 36.292,-37.732 36.292,-38.016 35.692,-38.616 35.381,-38.616 IC1.5 IC1.5@33.6,-36.835
  Bottom Layer w1.5: HD11.1 -32.5,-36 v2(33.6,-36)
MOTOR3: HD10.1 IC2.7 IC2.8 | length 82.3
  Top Layer w0.6: IC2.8 33.02,35.397 33.02,35.052 v2(33.274,34.798) 33.528,34.544 33.963,34.544 IC2.7
  Bottom Layer w1: HD10.1 -39.5,36 -33,36 -30.25,38.75 -16.25,38.75 -12.298,34.798 v2(33.274,34.798)
MOTOR4: HD12.1 IC2.5 IC2.6 | length 10.9
  Top Layer w0.6: IC2.6 37.808,36.592 ; IC2.5 38.7,35.688
  Top Layer w1: HD12.1 36,39.5 36,38.384 37.5,36.884 37.516,36.884 38.7,35.7
NetC1_2: C1.2 R1.2 X1.1 | length 5.7
  Top Layer w0.3: R1.2 -3.048,16.002 -2.732,16.318 C1.2 -0.943,15.991 X1.1
NetD1_1: BAT2.1 D1.1 D2.1 | length 33.2
  Top Layer w2.5: BAT2.1 -44.641,-14.795 D1.1@-42.836,-12.991
  Top Layer w3: D1.1 -39.318,-12.965 D2.1@-33.986,-7.634
  Bottom Layer w2.5: BAT2.1 -44.693,-14.795 D1.1
  Bottom Layer w3: D1.1 -39.345,-12.965 D2.1
NetD1_2: BAT_OUT.1 D1.2 D3.2 | length 74.6
  Top Layer w2.5: BAT_OUT.1 -44.502,-22.225 D1.2
  Bottom Layer w2.5: BAT_OUT.1 -44.502,-22.225 D1.2
  Bottom Layer w4: D1.2 -39.053,-23.865 ; D3.2 -31.75,12.648
  Bottom Layer w5: -38.735,-23.865 -34.365,-23.865 -26.035,-15.535 -26.035,10.477 -28.205,12.648 -31.75,12.648
NetD2_2: D2.2 SW1.1 | length 20.5
  Bottom Layer w2: SW1.1 -38.993,-5
  Bottom Layer w3: -38.993,-5 -37.385,-5 -34,-1.615 D2.2
NetD3_1: BAT1.1 D3.1 | length 10.6
  Top Layer w2.5: BAT1.1 -44.185,22.225 D3.1
  Bottom Layer w2.5: BAT1.1 -44.185,22.225 D3.1
NetIC1_2: IC1.2 R6.2 | length 3
  Top Layer w0.5: R6.2@30.497,-30.141 IC1.2
NetIC1_4: IC1.4 R8.2 | length 3.1
  Top Layer w0.6: R8.2@28.673,-31.908 IC1.4
NetIC2_2: IC2.2 R7.2 | length 3.3
  Top Layer w0.25: R7.2 29.506,30.086 IC2.2
NetIC2_4: IC2.4 R9.2 | length 3.3
  Top Layer w0.25: R9.2 33.552,30.43 IC2.4
NetL1_1: L1.1 SW1.2
NetLED1_2: LED1.2 R10.1 | length 3.3
  Top Layer w0.25: LED1.2 R10.1
NetLED2_2: LED2.2 R11.1 | length 3.3
  Top Layer w0.25: LED2.2 R11.1
NetLED3_2: LED3.2 R12.1 | length 3.3
  Top Layer w0.25: LED3.2 R12.1
NetLED4_2: LED4.2 R13.1 | length 2.3
  Top Layer w0.8: R13.1 -36.9,32.3 LED4.2
NetLED5_2: LED5.2 R14.1 | length 2.3
  Top Layer w1: R14.1 -26.9,32.3 LED5.2
NetLS1_1: LS1.1 U2.3 | length 9.5
  Top Layer w1: U2.3 40.5,-10.435 LS1.1
NetP1_1: P1.1 U1.33 | length 10.8
  Top Layer w0.3: U1.33 3.757,7.357 6.667,10.268 6.667,12.383 7.912,13.627 P1.1@9.532,13.627
NetR2_2: R2.2 U2.1 | length 3.2
  Top Layer w0.25: R2.2 38.292,-9.377 U2.1
NetR3_2: R3.2 S1.2 U1.32 | length 52.1
  Top Layer w0.25: U1.32 10.042,4.042 25.4,19.4 S1.2
  Bottom Layer w0.5: R3.2 S1.2
NetR5_1: R5.1 S6.1 | length 2.4
  Bottom Layer w0.5: R5.1 S6.1
OSC0: C2.2 U1.40 X1.2 | length 10.6
  Top Layer w0.25: U1.40 0.257,7.5 ; 0.3,7.5 0.257,7.5 ; C2.2 0.957,16.005 X1.2 0.957,9.357 0.257,8.657 0.257,7.5
OSC1: R1.1 U1.41 | length 10.4
  Top Layer w0.25: R1.1 -3.048,12.446 -2.602,12 -0.193,12 0.407,11.4 0.407,9.707 -0.243,9.057 U1.41
PA2: HD8.3 U1.19 | length 68
  Top Layer w0.3: U1.19 8.158,-2.458 v1(8.7,-3) ; v1(8.7,-9.3) 4.551,-9.3 2.4,-11.451 2.4,-23.1 1.5,-24 1.5,-28.155 3.645,-30.3 19.8,-30.3 25.4,-35.9 HD8.3
  Bottom Layer w0.3: v1(8.7,-9.3) v1(8.7,-3)
PA3: HD8.2 U1.20 | length 72.3
  Top Layer w0.3: U1.20 9.458,-1.958 v1(9.9,-2.4) ; v1(9.6,-10.2) 4.5,-10.2 3,-11.7 3,-23.349 2.1,-24.249 2.1,-27.9 3.9,-29.7 21.6,-29.7 27.94,-36.04 HD8.2
  Bottom Layer w0.3: v1(9.6,-10.2) 9.6,-2.7 v1(9.9,-2.4)
PC6: HD8.5 U1.14 | length 54.6
  Top Layer w0.254: U1.14 2.757,-9.843 0.6,-12 0.6,-23.1 0.3,-23.4 0.3,-28.619 3.181,-31.5 16.2,-31.5 20.32,-35.62 HD8.5
PC7: HD2.7 U1.13 | length 73.1
  Top Layer w0.25: HD2.7 -30.48,-41.28 -27.808,-38.608 -20.383,-38.608 -17.948,-36.173 -17.948,-30.73 -15.285,-28.067 -15.278,-28.067 -14.95,-27.739 -14.95,-19.75 v1(-12.218,-17.018) ; v1(-0.3,-22.8) 0,-22.5 0,-11.7 2.257,-9.443 U1.13
  Bottom Layer w0.25: v1(-12.218,-17.018) -10.5,-17.018 -9.6,-17.918 -9.6,-20.7 -6.6,-23.7 -3.3,-23.7 -2.4,-22.8 v1(-0.3,-22.8)
PD0: HD2.6 U1.61 | length 55.2
  Top Layer w0.25: HD2.6 -27.94,-41.402 -25.696,-39.158 -20.155,-39.158 -17.398,-36.401 -17.398,-30.958 -15.057,-28.617 -15.05,-28.617 -14.4,-27.967 -14.4,-20.4 -10.525,-16.525 -10.525,-3.925 -8.558,-1.958 U1.61
PD1: HD2.5 U1.62 | length 52.4
  Top Layer w0.25: HD2.5 -25.4,-41.402 -23.706,-39.708 -19.928,-39.708 -16.848,-36.628 -16.848,-31.186 -14.829,-29.167 -14.823,-29.167 -13.85,-28.194 -13.85,-20.75 -9.975,-16.875 -9.975,-4.275 -8.157,-2.458 U1.62
PD2: HD2.4 U1.63 | length 49.5
  Top Layer w0.25: HD2.4 -22.8,-43.12 -22.8,-41.4 -21.658,-40.258 -19.7,-40.258 -16.298,-36.856 -16.298,-31.413 -14.602,-29.717 -14.595,-29.717 -13.3,-28.422 -13.3,-21.1 -9.425,-17.225 -9.425,-4.625 -7.758,-2.958 U1.63
PD3: HD2.3 U1.64 | length 46.6
  Top Layer w0.25: HD2.3 -20.32,-41.656 -15.748,-37.084 -15.748,-31.641 -14.374,-30.267 -14.367,-30.267 -12.75,-28.65 -12.75,-21.328 -8.875,-17.453 -8.875,-4.975 -7.358,-3.458 U1.64
PD4: HD8.4 U1.43 | length 96.8
  Top Layer w0.25: v1(-10.2,3.6) v1(-10.2,9.6) ; U1.43 -1.243,8.357 -0.9,8.7 v1(-0.9,9.6)
  Top Layer w0.3: v1(1.5,-21.9) 1.5,-23.1 0.9,-23.7 0.9,-28.403 3.397,-30.9 18,-30.9 22.86,-35.76 HD8.4
  Bottom Layer w0.25: v1(-10.2,3.6) -12.825,0.975 -12.825,-2.388 -10.775,-4.438 -10.775,-9.238 -8.975,-11.038 -8.975,-20.338 -6.213,-23.1 -3.6,-23.1 -2.4,-21.9 v1(1.5,-21.9) ; v1(-10.2,9.6) v1(-0.9,9.6)
PD7: HD8.6 U1.10 | length 53
  Top Layer w0.25: U1.10 0.757,-9.443 -1.2,-11.4 -1.2,-23.4 -0.3,-24.3 -0.3,-28.8 3,-32.1 14.4,-32.1 17.78,-35.48 HD8.6
PF4: HD8.7 U1.5 | length 52.9
  Top Layer w0.3: v1(-4.5,-14.1) -4.5,-10.258 -1.743,-7.5 U1.5 ; v1(-2.1,-17.7) -2.1,-23.4 -0.9,-24.6 -0.9,-29.1 2.7,-32.7 12,-32.7 15.24,-35.94 HD8.7
  Bottom Layer w0.3: v1(-4.5,-14.1) -4.5,-16.2 -3,-17.7 v1(-2.1,-17.7)
PWM1: R6.1 U1.1 | length 59.6
  Top Layer w0.3: v1(-6.3,-15.9) -6.3,-10.2 -3.743,-7.643 U1.1 ; v3(4.8,-19.5) 4.8,-23.246 3.3,-24.746 3.3,-27.403 4.397,-28.5 28.666,-28.5 R6.1
  Bottom Layer w0.3: v1(-6.3,-15.9) -6.3,-16.8 -3.6,-19.5 v3(4.8,-19.5)
PWM2: R8.1 U1.4 | length 58
  Top Layer w0.3: v1(-5.4,-15) -5.4,-10.2 -2.243,-7.043 U1.4 ; v1(3.9,-18.6) 3.9,-23.297 2.7,-24.497 2.7,-27.651 4.149,-29.1 25.73,-29.1 R8.1
  Bottom Layer w0.3: v1(-5.4,-15) -5.4,-16.5 -3.3,-18.6 v1(3.9,-18.6)
PWM3: R7.1 U1.15 | length 55.2
  Top Layer w0.25: U1.15 3.257,-7.758 3.9,-8.4 v1(12,-8.4) ; v1(12,4.5) 26.4,18.9 26.4,26.814 R7.1
  Bottom Layer w0.25: v1(12,-8.4) v1(12,4.5)
PWM4: R9.1 U1.16 | length 52.7
  Top Layer w0.25: U1.16 3.757,-7.057 4.2,-7.5 v1(13.2,-7.5) ; v1(13.2,4.5) 27.3,18.6 27.3,24.179 R9.1
  Bottom Layer w0.25: v1(13.2,-7.5) v1(13.2,4.5)
RESET: C5.1 HD1.5 R4.1 R5.2 U1.38 | length 87
  Top Layer w0.3: HD1.5 -20.11,41.7 -17.306,41.7 -9.3,33.694 -9.3,20.098 -8.152,18.95 -8.15,18.95 v1(-7.8,18.6) ; U1.38 1.257,8.457 2.2,9.4 v3(2.2,18.6) 2.2,23.155 13.5,34.455 v1(13.5,39.205)
  Bottom Layer w0.3: v1(-7.8,18.6) v3(2.2,18.6)
  Bottom Layer w0.5: v1(13.5,39.205) R5.2
  Bottom Layer w0.8: R5.2 16.705,39.205 16.805,39.305 C5.1 18.595,39.305 18.695,39.205 R4.1
RX_CH1: HD3.1 U1.9 | length 42.3
  Top Layer w0.25: HD3.1 -9.3,-41.5 -9.3,-22.545 -1.8,-15.045 -1.8,-11.1 0.257,-9.043 U1.9
RX_CH2: HD3.2 U1.8 | length 47.5
  Top Layer w0.25: HD3.2 -6.6,-44.7 -8.1,-44.7 -9.9,-42.9 -9.9,-22.367 -2.4,-14.867 -2.4,-10.8 -0.243,-8.643 U1.8
RX_CH3: HD3.3 U1.7 | length 51.4
  Top Layer w0.25: HD3.3 -4.61,-45.25 -8.45,-45.25 -10.5,-43.2 -10.5,-22.189 -3,-14.689 -3,-10.5 -0.743,-8.243 U1.7
RX_CH4: HD3.4 U1.6 | length 55.2
  Top Layer w0.25: U1.6 -1.243,-7.843 -3.6,-10.2 -3.6,-14.511 -11.1,-22.011 -11.1,-43.5 -8.7,-45.9 -2.72,-45.9 HD3.4
RX_CH5: HD3.5 U1.59 | length 67
  Top Layer w0.25: v1(-10.2,-1.2) -9.3,-0.3 -8.7,-0.3 -8.042,-0.958 U1.59 ; v1(-7.5,-7.5) -7.5,-17.633 -11.65,-21.783 -11.65,-43.728 -8.928,-46.45 -0.73,-46.45 HD3.5
  Bottom Layer w0.25: v1(-10.2,-1.2) -8.4,-3 -8.4,-6.6 v1(-7.5,-7.5)
RX_CH6: HD3.6 U1.60 | length 68.3
  Top Layer w0.25: v1@-8.742,-1.458 U1.60 ; v1(-7.5,-6.3) -7.5,-6.333 -8.325,-7.158 -8.325,-17.681 -12.2,-21.556 -12.2,-43.956 -9.156,-47 1.26,-47 HD3.6
  Bottom Layer w0.25: v1(-9,-1.2) -7.5,-2.7 v1(-7.5,-6.3)
RXD: HD1.6 U1.17 | length 78.5
  Top Layer w0.3: HD1.6 -19.05,43.35 -17.97,44.43 -15.93,44.43 -15.26,43.76 -15.26,41.351 -7.8,33.891 v1(-7.8,21) ; U1.17 7.058,-3.458 8.7,-5.1 v1(11.1,-5.1)
  Bottom Layer w0.3: v1(-7.8,21) 5.7,21 8.572,18.127 8.572,6.725 11.4,3.898 11.4,-4.8 v1(11.1,-5.1)
SPEAKER: R2.1 U1.21 | length 30.9
  Top Layer w0.25: U1.21 13.458,-1.458 21.378,-9.377 R2.1
SW1: S2.2 U1.28 | length 32
  Top Layer w0.25: U1.28 16.012,2.042 21.59,7.62 S2.2
SW2: S3.2 U1.29 | length 39
  Top Layer w0.25: U1.29 15.242,2.542 21.59,8.89 36.83,8.89 S3.2
SW3: S4.2 U1.30 | length 38.8
  Top Layer w0.25: U1.30 14.472,3.042 20.955,9.525 32.385,9.525 35.56,12.7 S4.2
SW4: S5.2 U1.31 | length 28.4
  Top Layer w0.25: U1.31 13.702,3.542 20.32,10.16 27.94,10.16 S5.2
TCK: HD1.1 U1.52 | length 58.2
  Top Layer w0.3: HD1.1 -27.87,39.3 -18.3,39.3 -11.7,32.7 -11.7,18.6 -9.3,16.2 -9.3,3.9 -7.942,2.542 U1.52
TDI: HD1.4 U1.50 | length 50.7
  Top Layer w0.3: HD1.4 -24.13,42.13 -22.5,40.5 -17.803,40.5 -10.5,33.197 -10.5,19.097 -8.1,16.697 -8.1,4.5 -7.143,3.542 U1.50
TDO: HD1.3 U1.49 | length 54.4
  Top Layer w0.3: HD1.3 -25.42,44.43 -23.612,44.43 -22.88,43.698 -22.88,42.08 -21.9,41.1 -17.554,41.1 -9.9,33.446 -9.9,19.346 -7.5,16.946 -7.5,4.8 -6.742,4.042 U1.49
TMS: HD1.2 U1.51 | length 55.4
  Top Layer w0.3: HD1.2 -25.93,39.9 -18.051,39.9 -11.1,32.949 -11.1,18.849 -8.7,16.449 -8.7,4.2 -7.542,3.042 U1.51
TXD: HD1.7 U1.18 | length 71.5
  Top Layer w0.3: HD1.7 -16.51,41.753 -8.7,33.943 -8.7,20.698 -7.802,19.8 v1(-7.8,19.8) ; U1.18 7.458,-2.958 8.4,-3.9 v1(10.5,-3.9)
  Bottom Layer w0.3: v1(-7.8,19.8) 5.7,19.8 7.938,17.562 7.938,6.512 10.8,3.649 10.8,-3.6 v1(10.5,-3.9)
VDDC: C6.1 C7.1 U1.25 U1.56 | length 28.4
  Top Layer w0.3: U1.56 -4.142,0.542 -3.9,0.3 v3(-3.9,-0.3) ; v3(3.9,0.3) 4.142,0.542 U1.25
  Bottom Layer w0.5: 3.9,-0.9 v3(3.9,0.3) 3.958,0.242 C6.1
  Bottom Layer w0.8: C7.1 -4.442,0.242 v3(-3.9,-0.3)
  Bottom Layer w1: v3(-3.9,-0.3) -3.9,-1.5 -0.9,-4.5 -0.9,-6.6 -0.3,-7.2 3,-7.2 3.9,-6.3 3.9,-0.9
VIN: C8.1 C10.2 C21.2 C24.2 HD13.1 HD13.2 IC3.3 IC4.3 IC5.3 L1.2 | length 63.1
  Top Layer w1: v4(-32.018,26.678) -32.004,26.691 C8.1
  Bottom Layer w0.8: v4(-32.018,26.678) v4@-31.99,26.705 ; C10.2 -31.99,30.782 IC3.3 ; IC4.3 -21.83,30.655 C21.2 -19.812,30.732 ; IC5.3 -21.492,-30.352 C24.2 -19.558,-30.153
  Bottom Layer w1: v4@-31.99,26.705 IC3.3
  Bottom Layer w1.5: -32.018,25.767 v4(-32.018,26.678)
  Bottom Layer w2: HD13.1 HD13.2 -30.693,-28.893 -25.8,-24 -19.5,-24 ; -32.018,25.767 -32.018,25.35 -31.432,24.765 -18.732,24.765
  other v2: -19.558,-4.572 -18.034,-4.572 -16.51,-4.572 -19.558,4.572 -18.034,4.572 -16.51,4.572
XOSC0: C4.2 U1.34 X2.2 | length 11.1
  Top Layer w0.25: U1.34 3.257,7.757 5.452,9.952 X2.2 5.452,16.182 C4.2
XOSC1: C3.1 U1.36 X2.1 | length 10.7
  Top Layer w0.25: U1.36 2.257,8.557 3.452,9.752 X2.1 3.452,16.168 C3.1
pads on no net: D1.3 D3.3 HD3.7 HD7.5 HD7.6 HD7.7 IC3.4 IC4.4 IC5.4

## Polygon pours and split planes (outlines as drawn)
GND on Top Layer "Top Layer-No Net" (solid, remove dead copper, pour order 2): -49.5,-34.5 -49.5,35 -35,49.5 35,49.5 49.5,35 49.5,-35 35,-49.5 -35,-49.5 -49.5,-35
GND on Bottom Layer "Top Layer-No Net" (solid, remove dead copper, pour order 2): -49.5,-34.5 -49.5,35 -35,49.5 35,49.5 49.5,35 49.5,-35 35,-49.5 -35,-49.5 -49.5,-35

## Keep-outs
Keep-Out Layer:
  the board outline again, w0.5

## Other copper
Top Layer:
  region net NetL1_1: -46.99,-1.27 -38.354,-1.27 -36.576,-3.048 -27.432,-3.048 -26.924,-2.54 -26.924,2.54 -27.432,3.048 -36.576,3.048 -38.608,1.016 -46.99,1.016 -47.498,0.508 -47.498,-0.762
  region net VIN: -20.066,-4.826 -19.558,-5.334 -15.494,-5.334 -14.986,-4.826 -14.986,4.826 -15.494,5.334 -19.558,5.334 -20.066,4.826
Bottom Layer:
  region net VIN: -20.25,-30 -19.5,-30.75 -16.5,-30.75 -15.75,-30 -15.75,30.75 -16.75,31.75 -19.75,31.75 -20.25,31.25

## Silkscreen, mask and mechanical layers (free items; w line width, h text height)
Top Overlay:
  lines w0.3: -11.112,41.91 -11.747,41.91 -11.747,30.162 -10.76,30.162 ; -10.477,40.64 -11.112,40.64 -11.112,43.18 -10.477,43.18 ; -9.807,27.94 -10.76,27.94 -10.76,32.385 -9.807,32.385 ; 35.242,-41.275 34.607,-40.64 38.735,-36.513 41.434,-33.814 ; 35.56,41.275 34.766,40.481 45.72,29.527 44.926,28.734 ; 40.322,33.338 41.116,34.131 ; 40.799,-33.179 41.434,-33.814 ; 45.244,-28.734 45.879,-29.369 41.434,-33.814 ; -12.7,-79.375 12.7,-79.375 12.7,-34.29 -12.7,-34.29 -12.7,-79.375 ; -10.16,39.36 10.16,39.36 10.16,55.245 -10.16,55.245 -10.16,39.36
  text "RST" at 16.2,46.8 h1.2
  text "HIB" at 26.67,46.672 h1.2
  text "TCK" at -31.115,45.085 h1.2 r90
  text "TMS" at -28.575,45.085 h1.2 r90
  text "TDO" at -26.035,45.085 h1.2 r90
  text "TDI" at -23.495,45.085 h1.2 r90
  text "RST" at -20.955,45.085 h1.2 r90
  text "RXD" at -18.415,45.085 h1.2 r90
  text "TXD" at -15.875,45.085 h1.2 r90
  text "GND" at -13.335,45.085 h1.2 r90
  text "5V" at -8.255,44.92 h1.2 r90
  text "GND" at -5.715,44.92 h1.2 r90
  text "SCL" at -3.175,44.92 h1.2 r90
  text "SDA" at -0.635,44.92 h1.2 r90
  text "INT" at 9.525,44.92 h1.2 r90
  text "GND" at -36.195,39.052 h1.2 r315
  text "5V" at -38.1,37.147 h1.2 r315
  text "5V" at -8.255,36.83 h1.2 r90
  text "GND" at -3.175,35.56 h1.2 r90
  text "SCL" at -0.635,35.56 h1.2 r90
  text "SDA" at 1.905,35.56 h1.2 r90
  text "RDY" at 4.445,35.56 h1.2 r90
  text "M3" at -39.914,35.333 h1.2 r315
  text "5V" at -26.125,34.732 h1 r90
  text "3.3V" at -5.715,34.607 h1.2 r90
  text "AINT" at 6.985,34.607 h1.2 r90
  text "GINT" at 9.525,34.607 h1.2 r90
  text "5V" at -45.72,33.337 h1.2
  text "5V" at -45.72,30.797 h1.2
  text "M4" at 40.64,30.797 h1.2 r45
  text "MPU6050" at -10.125,30.48 h1.2
  text "5V" at 41.91,29.527 h1.2 r45
  text "BMP085" at -10.125,28.575 h1.2
  text "3.3V" at -45.72,28.257 h1.2
  text "GND" at 42.545,27.305 h1.2 r45
  text "3.3" at -36.195,26.67 h1 r90
  text "GND" at -45.72,25.717 h1.2
  text "UP" at 34.607,24.13 h1.2
  text "END" at 48.26,11.112 h1.2 r90
  text "BACK" at 24.13,10.477 h1.2 r90
  text "DOWN" at 33.337,0.318 h1.2
  text "VIN" at -45.72,-26.987 h1.2
  text "VIN" at -45.72,-29.527 h1.2
  text "M1" at 45.085,-29.527 h1.2 r135
  text "5V" at 43.815,-30.797 h1.2 r135
  text "GND" at -45.72,-32.067 h1.2
  text "GND" at 42.545,-32.067 h1.2 r135
  text "GND" at -45.72,-34.608 h1.2
  text "GND" at -39.053,-35.877 h1.2 r45
  text "5V" at -37.148,-37.783 h1.2 r45
  text "GND" at -12.383,-38.735 h1.2
  text "M2" at -35.242,-39.688 h1.2 r45
  text "PC7" at -29.845,-41.275 h1.2 r90
  text "PD0" at -27.305,-41.275 h1.2 r90
  text "PD1" at -24.765,-41.275 h1.2 r90
  text "PD2" at -22.225,-41.275 h1.2 r90
  text "PD3" at -19.685,-41.275 h1.2 r90
  text "3.3V" at -17.145,-41.275 h1.2 r90
  text "GND" at -14.605,-41.275 h1.2 r90
  text "5V" at -11.747,-41.275 h1.2
  text "PF4" at 15.875,-41.275 h1.2 r90
  text "PD7" at 18.415,-41.275 h1.2 r90
  text "PC6" at 20.955,-41.275 h1.2 r90
  text "PD4" at 23.495,-41.275 h1.2 r90
  text "PA2" at 26.035,-41.275 h1.2 r90
  text "PA3" at 28.575,-41.275 h1.2 r90
  text "GND" at 31.115,-41.275 h1.2 r90
  text "CH1" at -6.985,-48.26 h1.2 r90
  text "CH2" at -4.445,-48.26 h1.2 r90
  text "CH3" at -1.905,-48.26 h1.2 r90
  text "CH4" at 0.635,-48.26 h1.2 r90
  text "CH5" at 3.175,-48.26 h1.2 r90
  text "CH6" at 5.715,-48.26 h1.2 r90

## Text inside footprints (layer, text, board x,y; h text height)
D1: Mechanical 1 "K" at -43.613,-12.415 h2 r270; Mechanical 1 "A" at -43.613,-23.315 h2 r270
D3: Mechanical 1 "K" at -43.613,24.097 h2 r270; Mechanical 1 "A" at -43.613,13.197 h2 r270
HD1: Mechanical 1 "1" at -31.96,42.78 h1.2; Mechanical 1 "8" at -14.26,42.78 h1.2
HD2: Mechanical 1 "1" at -15.06,-42.78 h1.2 r180; Mechanical 1 "7" at -30.31,-42.78 h1.2 r180
HD3: Mechanical 1 "7" at 7.45,-43.58 h1.2; Mechanical 1 "1" at -7.8,-43.58 h1.2
HD4: Mechanical 1 "7" at 7.45,-41.04 h1.2; Mechanical 1 "1" at -7.8,-41.04 h1.2
HD5: Mechanical 1 "7" at 7.45,-38.5 h1.2; Mechanical 1 "1" at -7.8,-38.5 h1.2
HD6: Mechanical 1 "1" at -9.1,40.24 h1.2; Mechanical 1 "8" at 8.6,40.24 h1.2
HD7: Mechanical 1 "1" at -9.1,42.78 h1.2; Mechanical 1 "8" at 8.6,42.78 h1.2
HD8: Mechanical 1 "7" at 15.41,-42.78 h1.2 r180; Mechanical 1 "1" at 30.66,-42.78 h1.2 r180
HD13: Mechanical 1 "4" at -47.879,-33.718 h1.2 r270; Mechanical 1 "1" at -47.879,-26.098 h1.2 r270
HD14: Mechanical 1 "4" at -47.879,26.606 h1.2 r270; Mechanical 1 "1" at -47.879,34.226 h1.2 r270
IC1: Mechanical 1 "8" at 35.998,-34.418 h1.2 r315; Mechanical 1 "5" at 33.311,-37.105 h1.2 r315; Mechanical 1 "4" at 31.029,-34.682 h1.2 r315
IC2: Mechanical 1 "4" at 34.166,30.737 h1.2 r45; Mechanical 1 "5" at 36.589,33.019 h1.2 r45; Mechanical 1 "8" at 33.902,35.706 h1.2 r45
IC3: Mechanical 1 "3" at -32.4,26.975 h1.2 r180; Mechanical 1 "2" at -34.605,26.975 h1.2 r180; Mechanical 1 "1" at -36.81,26.975 h1.2 r180
IC4: Mechanical 1 "3" at -22.24,26.975 h1.2 r180; Mechanical 1 "2" at -24.445,26.975 h1.2 r180; Mechanical 1 "1" at -26.65,26.975 h1.2 r180
IC5: Mechanical 1 "3" at -21.903,-33.377 h1.2 r180; Mechanical 1 "2" at -24.108,-33.377 h1.2 r180; Mechanical 1 "1" at -26.313,-33.377 h1.2 r180
L1: Mechanical 1 "1" at -29.4,-0.5 h1.2; Mechanical 1 "2" at -18.3,-0.5 h1.2
LS1: Mechanical 1 "2" at 33.18,-19.2 h1.2 r180; Mechanical 1 "1" at 40.7,-19.3 h1.2 r180
SW1: Top Overlay "ON" at -44.768,8.255 h1.2; Mechanical 1 "ON" at -42.815,4 h1.2 r180
U1: Mechanical 1 "16" at 3.107,-4.308 h0.8 r90; Mechanical 1 "17" at 4.707,-3.808 h0.8 r90; Mechanical 1 "32" at 4.807,2.892 h0.8 r90; Mechanical 1 "33" at 2.707,4.192 h0.8; Mechanical 1 "48" at -3.993,4.192 h0.8; Mechanical 1 "49" at -4.593,4.492 h0.8 r270; Mechanical 1 "64" at -4.593,-1.508 h0.8 r270
U2: Mechanical 1 "B" at 38.49,-9.19 h1 r270; Mechanical 1 "C" at 39.535,-10.045 h1 r270; Mechanical 1 "E" at 38.49,-11.09 h1 r270